# Altium PCB PCB_485.PcbDoc
Units mil, origin at the board's own origin, x right, y up, seen from the top; angles counter-clockwise.
Board outline 1889.76 x 944.88 mil, 2 copper layers (Top Layer, Bottom Layer); 24 components, 15 nets, 71 pads, 0 vias.
Unrouted connection lines stored in the file: 41.
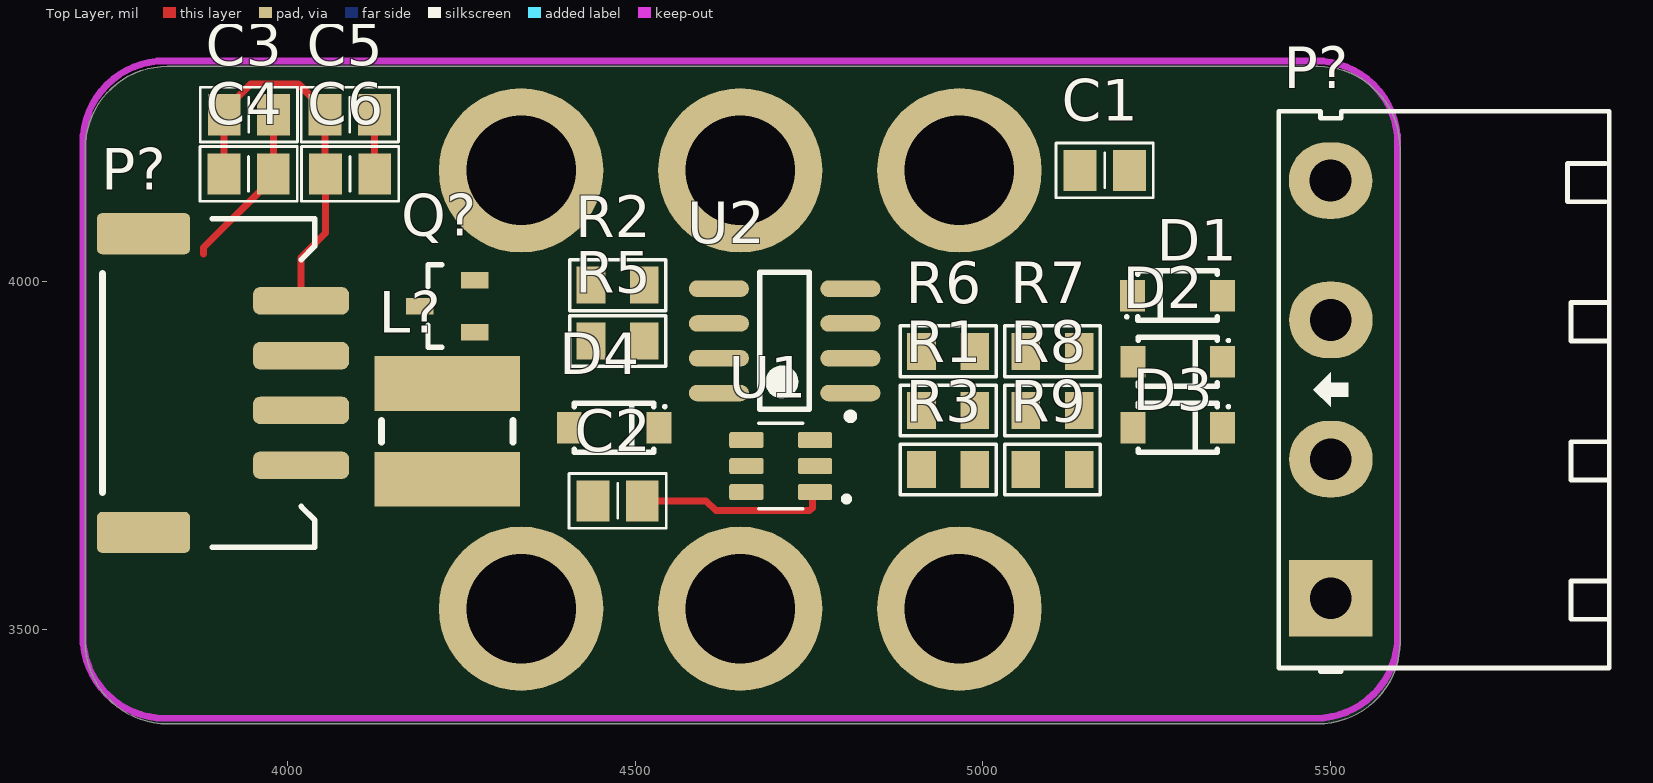
[diagram p0: Top Layer view]
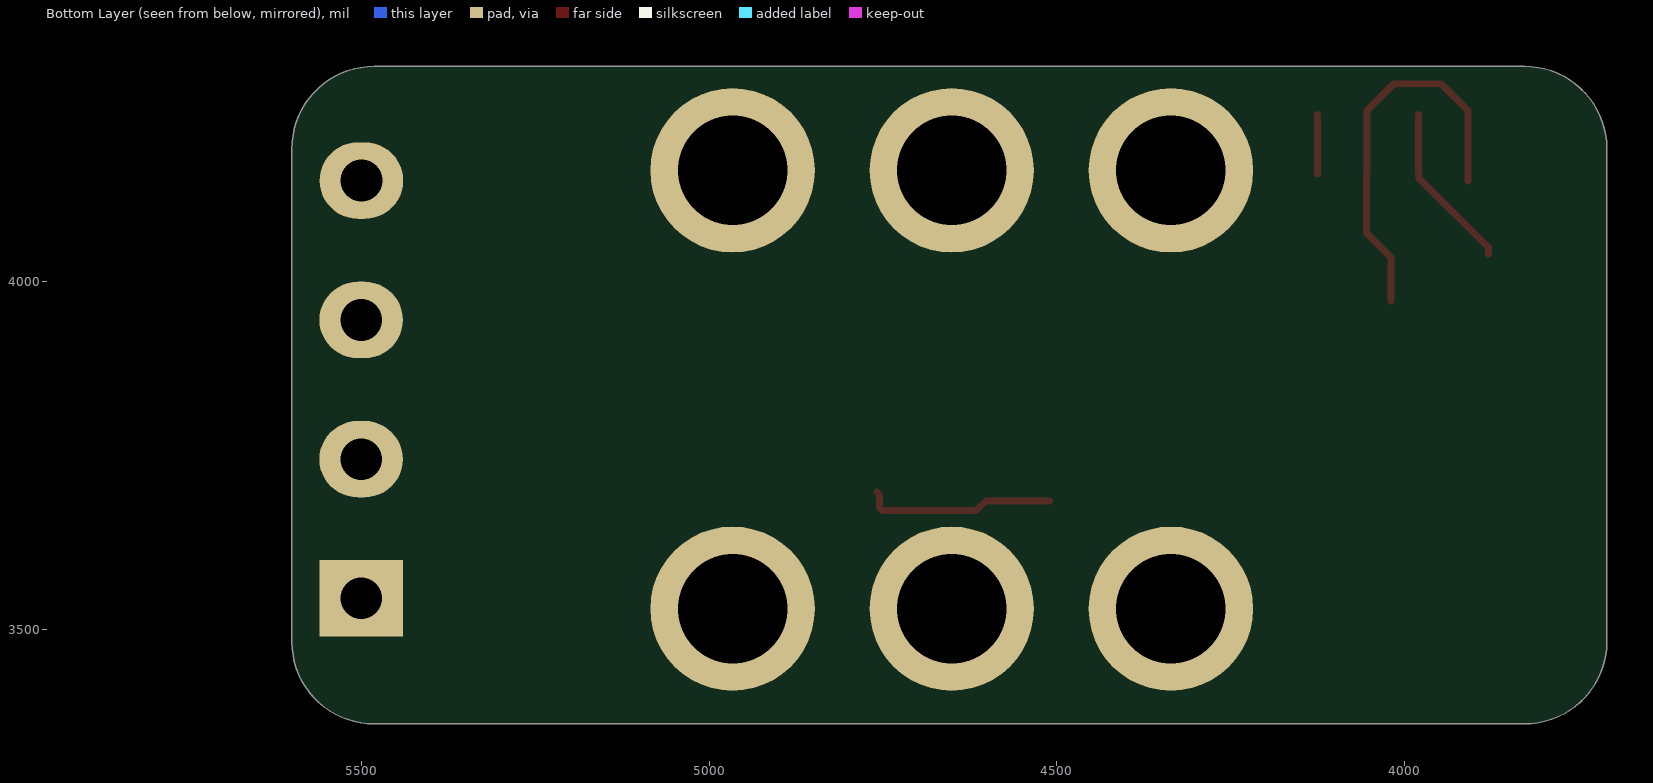
[diagram p1: Bottom Layer view, seen from below]

## Layer stack, top to bottom
Top Solder: solder mask 0.4, Solder Resist, Dk 3.5
Top Layer: signal copper 1.4
Dielectric 1: dielectric 12.6, FR-4, Dk 4.8
Bottom Layer: signal copper 1.4
Bottom Solder: solder mask 0.4, Solder Resist, Dk 3.5

## Board outline
3709.73,3482.58 3709.73,4191.24 cw(c3827.84,4191.24) 3827.84,4309.35 5481.38,4309.35 cw(c5481.38,4191.24) 5599.49,4191.24 5599.49,3482.58 cw(c5481.38,3482.58) 5481.38,3364.47 3827.84,3364.47 cw(c3827.84,3482.58)

## Design rules (kind name [scope] priority, off if disabled: settings)
Clearance [All] p1: gap=10 ignorepadtopadclearanceinfootprint=FALSE except(0: Arc-Hole Track-Hole SMDPad-Hole THPad-Hole Via-Hole Fill-Hole Poly-Hole Region-Hole Text-Hole)
PolygonConnect [All] p1: connectstyle=Relief reliefconductorwidth=10 reliefentries=4 polygonreliefangle="90 Angle" airgapwidth=10
RoutingVias [All] p1: holewidth=28 width=50 viastyle="Through Hole" minholewidth=28 minwidth=50 maxholewidth=28 maxwidth=50
SolderMaskExpansion [All] p1: expansion=4 istentingtop=FALSE
Width [All] p1: maxlimit=10 minlimit=10 preferedwidth=10
30 further rules are at their usual default settings.

## Components (designator, comment, footprint, x,y, rotation, side; value= is the part's Value field where it differs from the comment)
C1 "100n" "C 0805" 5175,4160 r180 top
C2 "100n" "C 0805" 4475,3685 r180 top
C3 "10u" "C 0805" 3945,4240 r180 top
C4 "10u" "C 0805" 3944.57,4155 r180 top
C5 "10u" "C 0805" 4090,4240 r180 top
C6 "100n" "C 0805" 4090.43,4155 r180 top
D1 "Diode ESD/TVS" SOD123 5279.57,3980 r180 top
D2 "Diode ESD/TVS" SOD123 5280,3885 r0 top
D3 "Diode ESD/TVS" SOD123 5280,3790 r0 top
D4 "Diode" SOD123 4470,3790 r0 top
L? "Inductor" "Inductor SMD CDRH3D48" 4230,3785 r270 top
P? "Header 4" HDR/Terminal/4/RA 5499.87,3845.13 r90 top
P? "Header 4" HDR/Header/4/2mm/BOX/SMD 4020,3854.37 r90 top
Q? "Transistor NPN" SOT-23 4230,3965 r180 top
R1 "4.7K" "R 0805" 4950,3815 r180 top
R2 "1k" "R 0805" 4475,3995 r0 top
R3 "4.7K" "R 0805" 4950,3730 r0 top
R5 "1K" "R 0805" 4475,3915 r0 top
R6 "4.7K" "R 0805" 4950,3900 r0 top
R7 "100k" "R 0805" 5100,3900 r180 top
R8 "51k" "R 0805" 5100,3815 r0 top
R9 "10k" "R 0805" 5100,3730 r180 top
U1 "LM2734YMK/NOPB" SOT95P280X110-6N 4709.41,3735 r180 top
U2 "MAX485" SOIC-8 4715,3915 r180 top

## Footprints (in the part's own frame and the unit in brackets; to place one, negate y for a bottom-side part, rotate by r counter-clockwise, add the part's x,y. Pads: shape width x height; smd on the part's side, far side on the other; paste and mask are expansions set on the pad)
"C 0805" [mm] "Chip Capacitor, 2-Leads, Body 2.0x1.3mm, IPC Medium Density"
  rect 1.2x1.5 smd: 1(-0.9,0) 2(0.9,0)
  silkscreen extent -1.78,-1 1.78,1, body extent -1,-0.64 1,0.61, height 0.6
HDR/Header/4/2mm/BOX/SMD [mm]
  rrect50% 1x3.5 smd: 1(-3,0) 2(-1,0) 3(1,0) 4(3,0)
  rrect25% 1.5x3.4 smd: SHIELD(-5.45,5.75) SHIELD(5.45,5.75)
  silkscreen extent -6,-0.5 6,7.25, body extent -5.95,-1.35 5.95,7.25, height 4.8
HDR/Terminal/4/RA [mil] "Header 4, 4 pin, hight 300mil, Pin to Pin 200, Colour Green"
  rect 110x120 hole 60: 1(-300.2,-0.2)
  oval 110x120 hole 60: 2(-100.2,-0.2) 3(99.87,-0.13) 4(300.2,0.2)
  silkscreen extent -405,-400 400,75, body extent -390,-403 392,70, height 334
"Inductor SMD CDRH3D48" [mm] "Precision Wire Wound Inductor, 2-Leads, Body 10.0x8.0mm, IPC Low Density"
  rect 2x5.3 smd: 1(-1.75,0) 2(1.75,0)
  silkscreen extent -0.4,-2.4 0.4,2.4, body extent -2.25,-2.24 2.25,2.25, height 3.5
"R 0805" [mm] "Chip Resistor, 2-Leads, Body 2.0x1.3mm, IPC Medium Density"
  rect 1.05x1.35 smd: 1(-0.975,0) 2(0.975,0)
  silkscreen extent -1.75,-0.92 1.75,0.92, body extent -1,-0.61 1,0.59, height 0.5
SOD123 [mm] "Molded Diode, 2-Leads, Body 2.7x1.6mm, IPC Medium Density"
  rect 0.91x1.143 smd: 1(-1.64,0) 2(1.64,0)
  silkscreen extent -1.45,-0.9 1.9,0.9, body extent -1.85,-0.78 1.85,0.77, height 1.35
SOIC-8 [mm] "SOIC, 8-Leads, Body 5.0x4.0mm (max), Pitch 1.27mm, IPC Medium Density"
  oval 2.2x0.6 smd: 1(-2.4,1.905) 2(-2.4,0.635) 3(-2.4,-0.635) 4(-2.4,-1.905) 5(2.4,-1.905) 6(2.4,-0.635) 7(2.4,0.635) 8(2.4,1.905)
  silkscreen extent -2.53,-2.5 0.9,2.88, body extent -3,-2.49 3,2.41, height 1.75
SOT95P280X110-6N [mm]
  rrect25% 1.25x0.59 smd: 1(-1.255,0.95) 2(-1.255,0) 3(-1.255,-0.95) 4(1.255,-0.95) 5(1.255,0) 6(1.255,0.95)
  silkscreen extent -2.5,-1.57 0.8,1.57, body extent -1.4,-1.45 1.4,1.45, height 1.1
SOT-23 [mm] "SOT23, 3-Leads, Body 3.0x2.5mm (max), Pitch 0.95mm, IPC Medium Density"
  rect 1x0.6 smd: 1(-1,0.95) 2(-1,-0.95) 3(1,0)
  silkscreen extent 0.2,-1.5 0.7,1.5, body extent -1.28,-1.46 1.27,1.46, height 0.95

## Part data
C1 C2 C3 C4 C5 C6: library part "Capacitor NP", "Capacitor non-pol"
D4: "Default Diode"
P? P?: "Header, 4-Pin"
Q?: "NPN Bipolar Transistor"
R1 R2 R3 R5 R6 R7 R8 R9: library part Resistor, "Resistor"
U1: "3V to 20V Input, 1A Step-Down Converter with Light Load Efficiency 6-SOT-23-THIN -40 to 125", PACKAGE="SOT-23-THN-6 Texas Instruments", Availability="In Stock", Check_prices=https://www.snapeda.com/parts/LM2734YMK/Texas+Instruments/view-part/?ref=eda, MF="Texas Instruments", MP=LM2734YMK, Price=None, Purchase-URL=https://pricing.snapeda.com/search/part/LM2734YMK/?ref=eda, SnapEDA_Link=https://www.snapeda.com/parts/LM2734YMK/Texas+Instruments/view-part/?ref=snap
U2: "Low-Power, Slew-Rate-Limited  RS-485/RS-422 Transceivers"

## Free pads (board coordinates)
  round 236.22 hole 157.48: 2(4336.26,3530.08) 2(4336.26,4160) 2(4651.22,3530.08) 2(4651.22,4160) 2(4966.18,3530.08) 2(4966.18,4160)

## Nets (pads, with @x,y where several pads share a name; then routed paths per layer and width w, separated by ;. In a path a pad name is that pad's centre, name@x,y a point inside that pad or via, vN(x,y) a via of type N, cw(c..) or ccw(c..) an arc to the next point about the centre after c; other vN are vias at no path point)
+5: C1.2 C5.1 C6.1 L?.2 P?.3@4020,3893.74 R6.1 R8.2 U2.8 | length 85.2
  Top Layer w10: C5.1 4125.43,4155.43 C6.1
+12: C3.1 C4.1 P?.3@5500,3945 R7.1 U1.5 | length 241.6
  Top Layer w10: 3880,4040 3880,4049.09 3980,4149.09 C4.1 3980.43,4155.43 C3.1
-5: R3.2
A: D2.1 D3.2 P?.2@5500.06,3744.94 R6.2 U2.6
B: D1.1 D2.2 P?.1@5500.06,3544.94 R1.1 U2.7
GND: C1.1 C3.2 C4.2 C5.2 C6.2 D1.2 D3.1 D4.1 P?.4 Q?.2 R1.2 R9.1 U1.2 U2.4 U2.5 | length 566.2
  Top Layer w10: C4.2@3909.13,4145 3909.57,4145.43 C3.2 3909.57,4245.91 3948.19,4284.53 4015.94,4284.53 4054.57,4245.91 C5.2 4054.57,4155.43 C6.2 4055,4070 4020,4035 P?.4@4020,3972.48
NetC2_1: C2.1 U1.1 | length 276.2
  Top Layer w10: C2.1 4602.08,3685 4616.09,3670.98 4750.98,3670.98 4755,3675 4755,3693.78 U1.1
NetC2_2: C2.2 D4.2 L?.1 U1.6
NetQ?_1: Q?.1 R5.2
NetQ?_3: Q?.3 R3.1 U2.2 U2.3
NetR2_1: R2.1 U2.1
NetR7_2: R7.2 U1.4
NetR8_1: R8.1 R9.2 U1.3
RX: P?.1@4020,3736.26 R2.2
TX: P?.2@4020,3815 R5.1
pads on no net: P?.SHIELD

## Keep-outs
Top Layer:
  lines w10: 3706.34,3490.71 ccw(c3824.45,3490.71) 3824.45,3372.6 5477.99,3372.6 ccw(c5477.99,3490.71) 5596.1,3490.71 5596.1,4199.37 ccw(c5477.99,4199.37) 5477.99,4317.48 3824.45,4317.48 ccw(c3824.45,4199.37) 3706.34,4199.37 3706.34,3490.71